# Altium PCB TSAL.PcbDoc
Units mm, origin at the board's own origin, x right, y up, seen from the top; angles counter-clockwise.
Board outline 91 x 81 mm, 2 copper layers (Top Layer, Bottom Layer); 29 components, 19 nets, 85 pads, 2 vias.
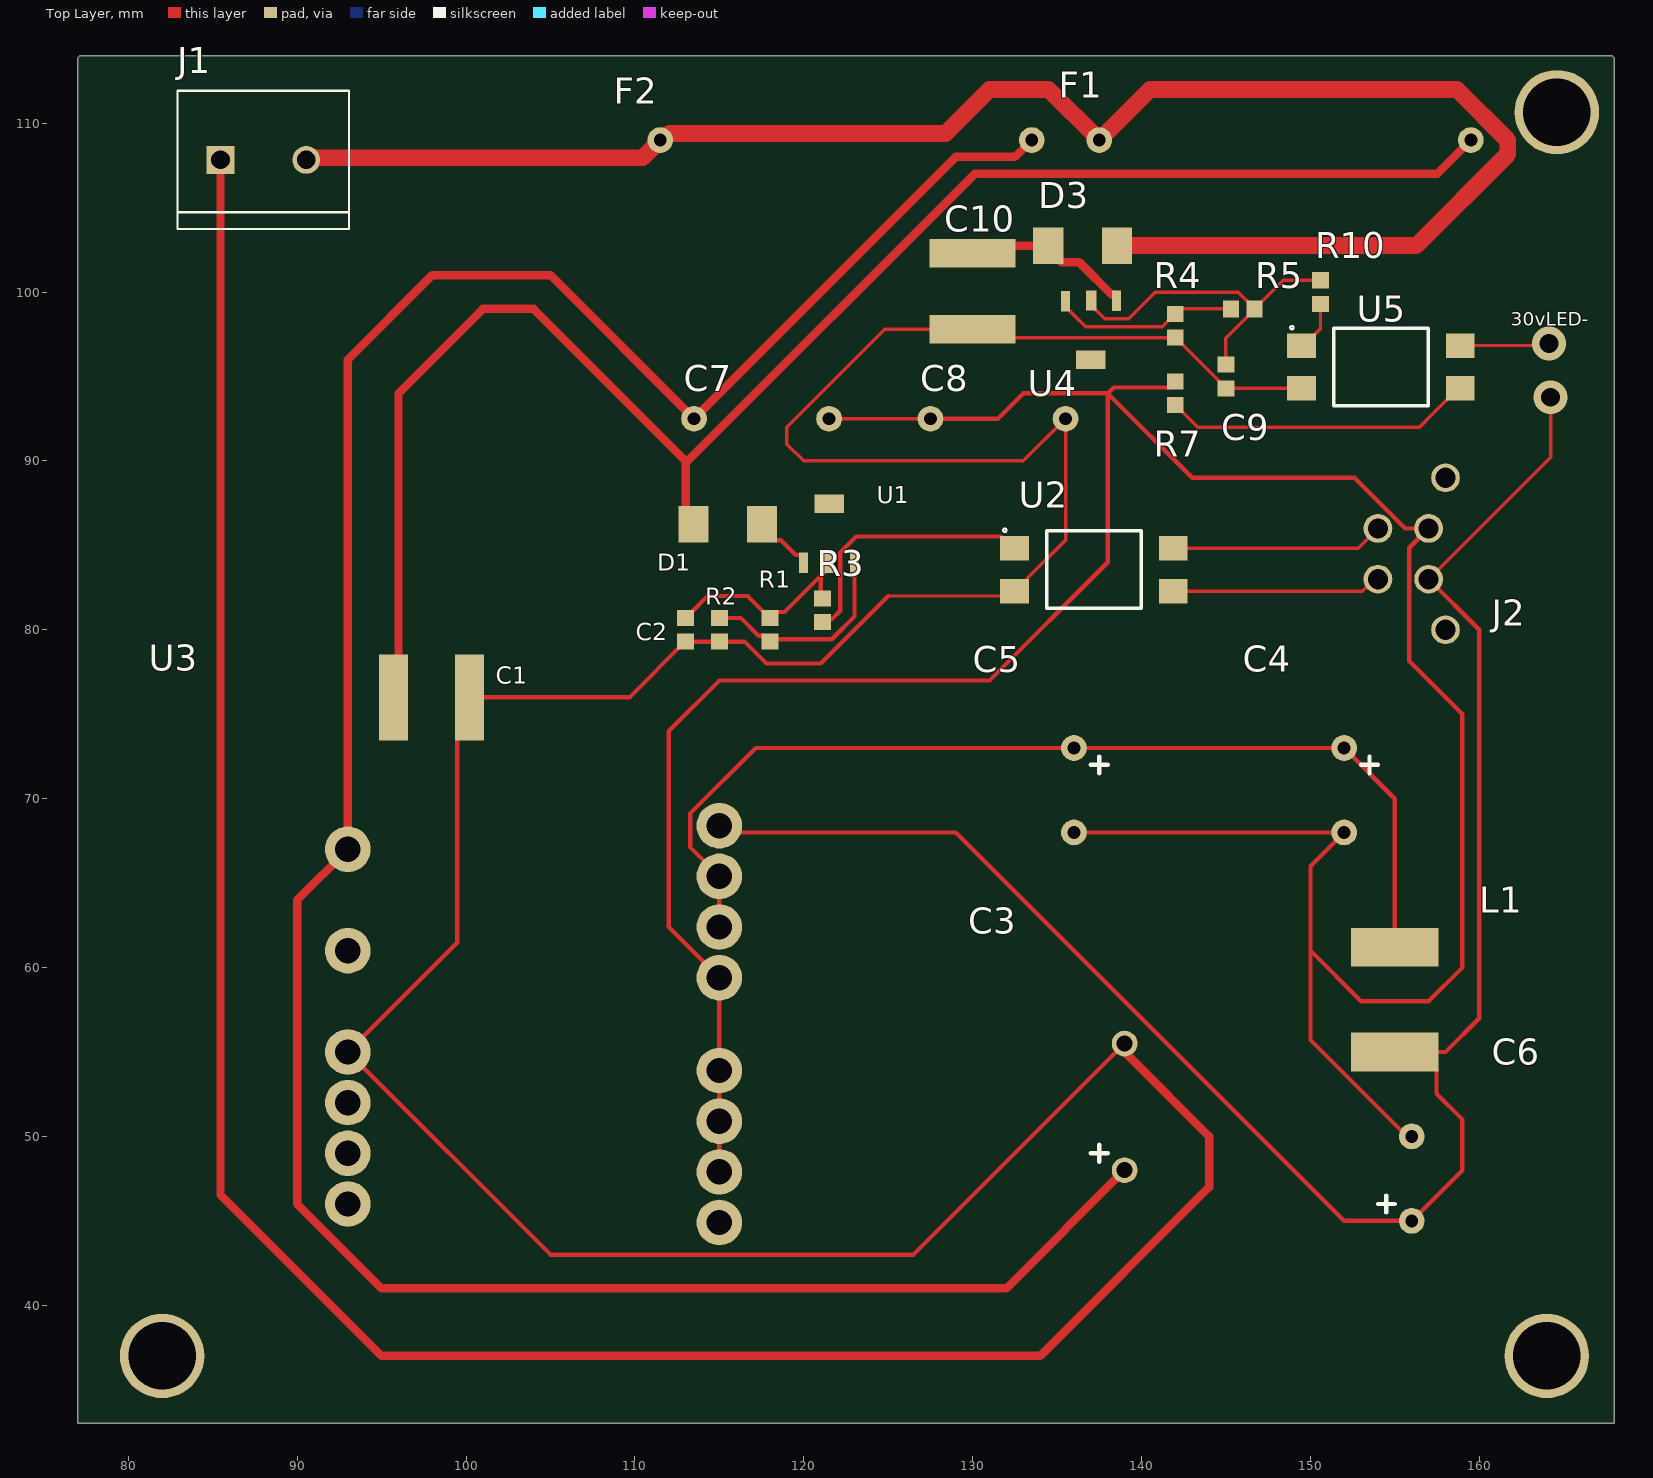
[diagram p0: Top Layer view]
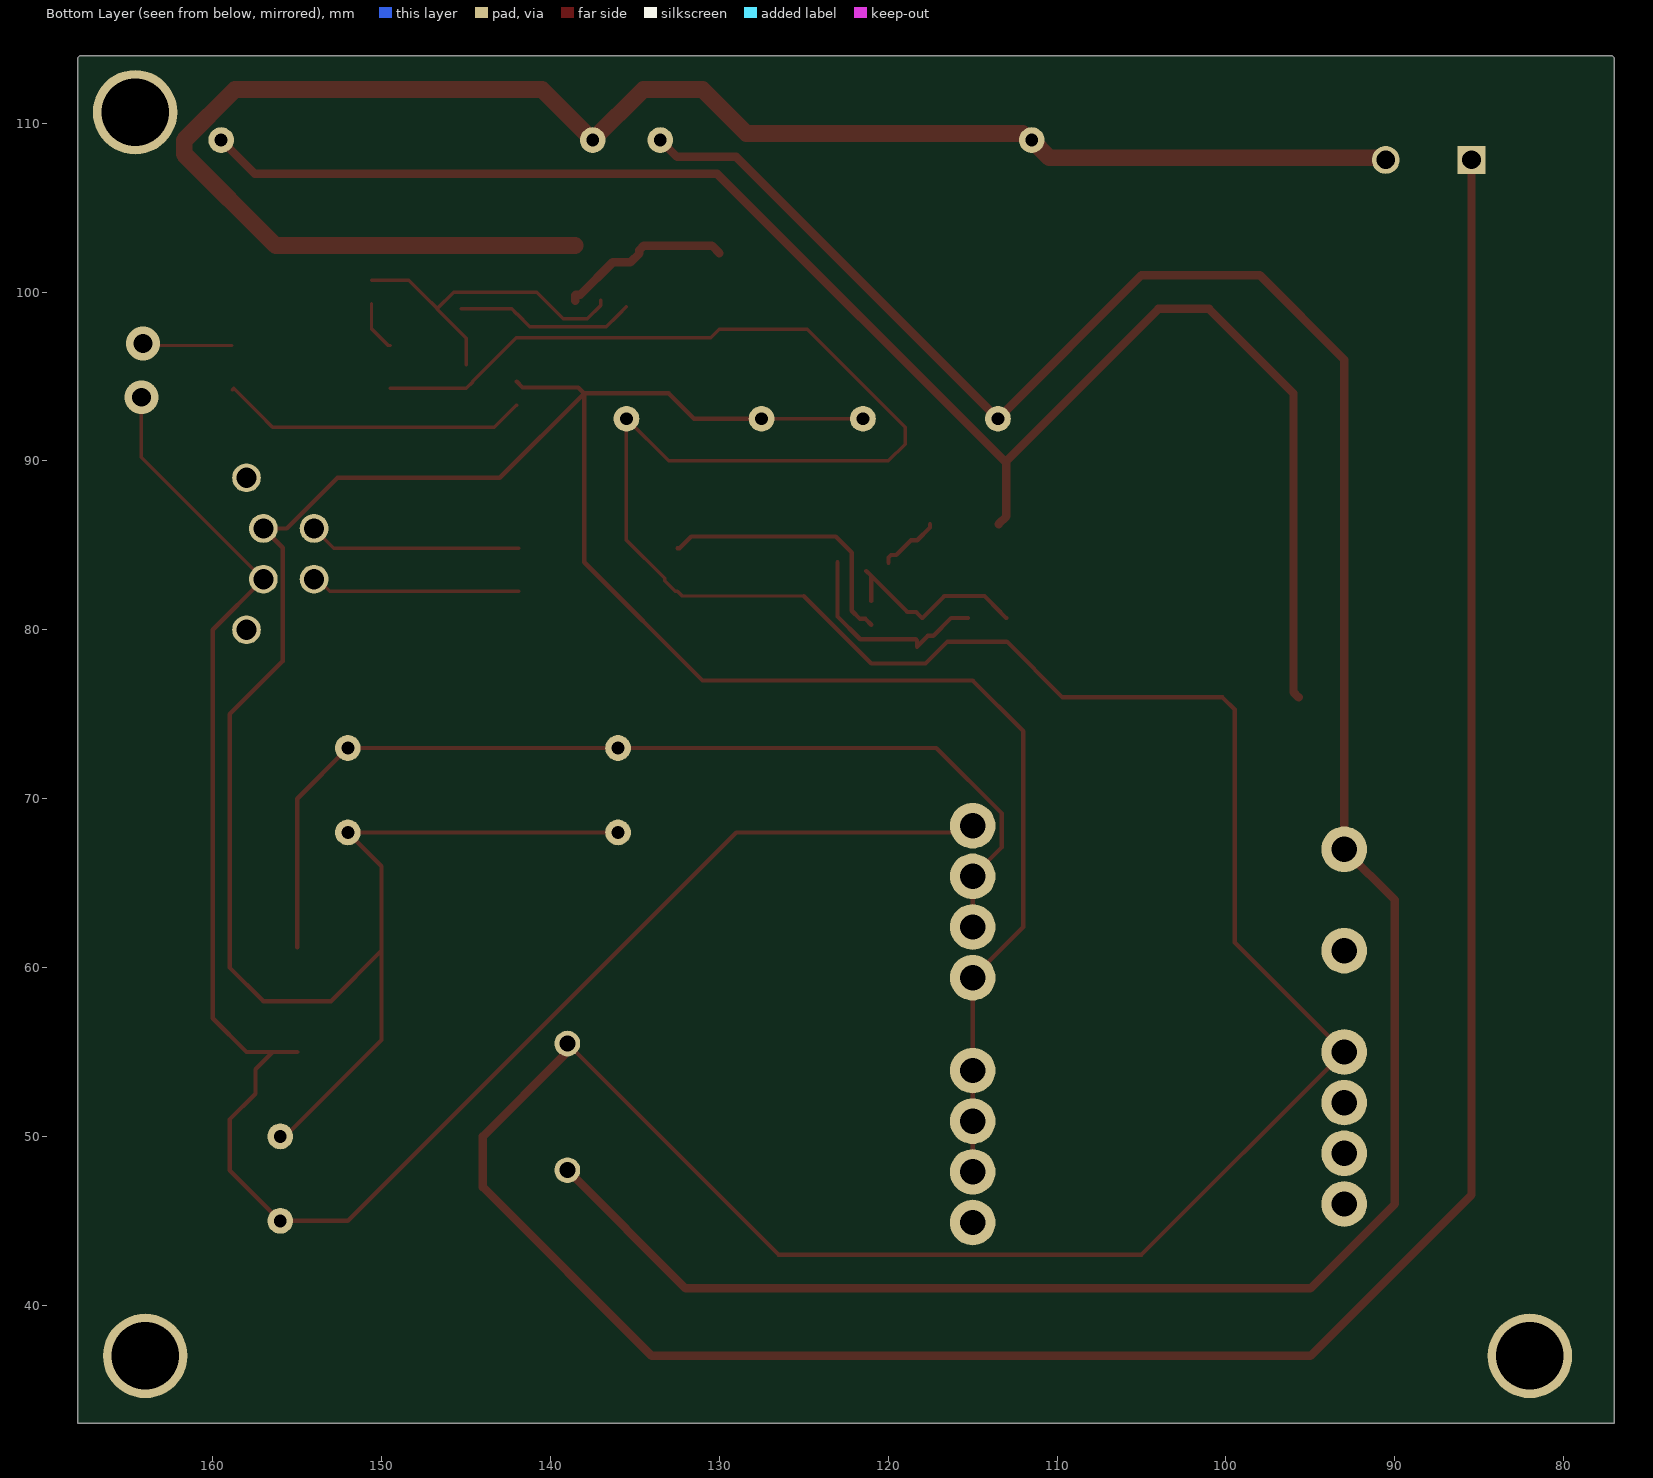
[diagram p1: Bottom Layer view, seen from below]
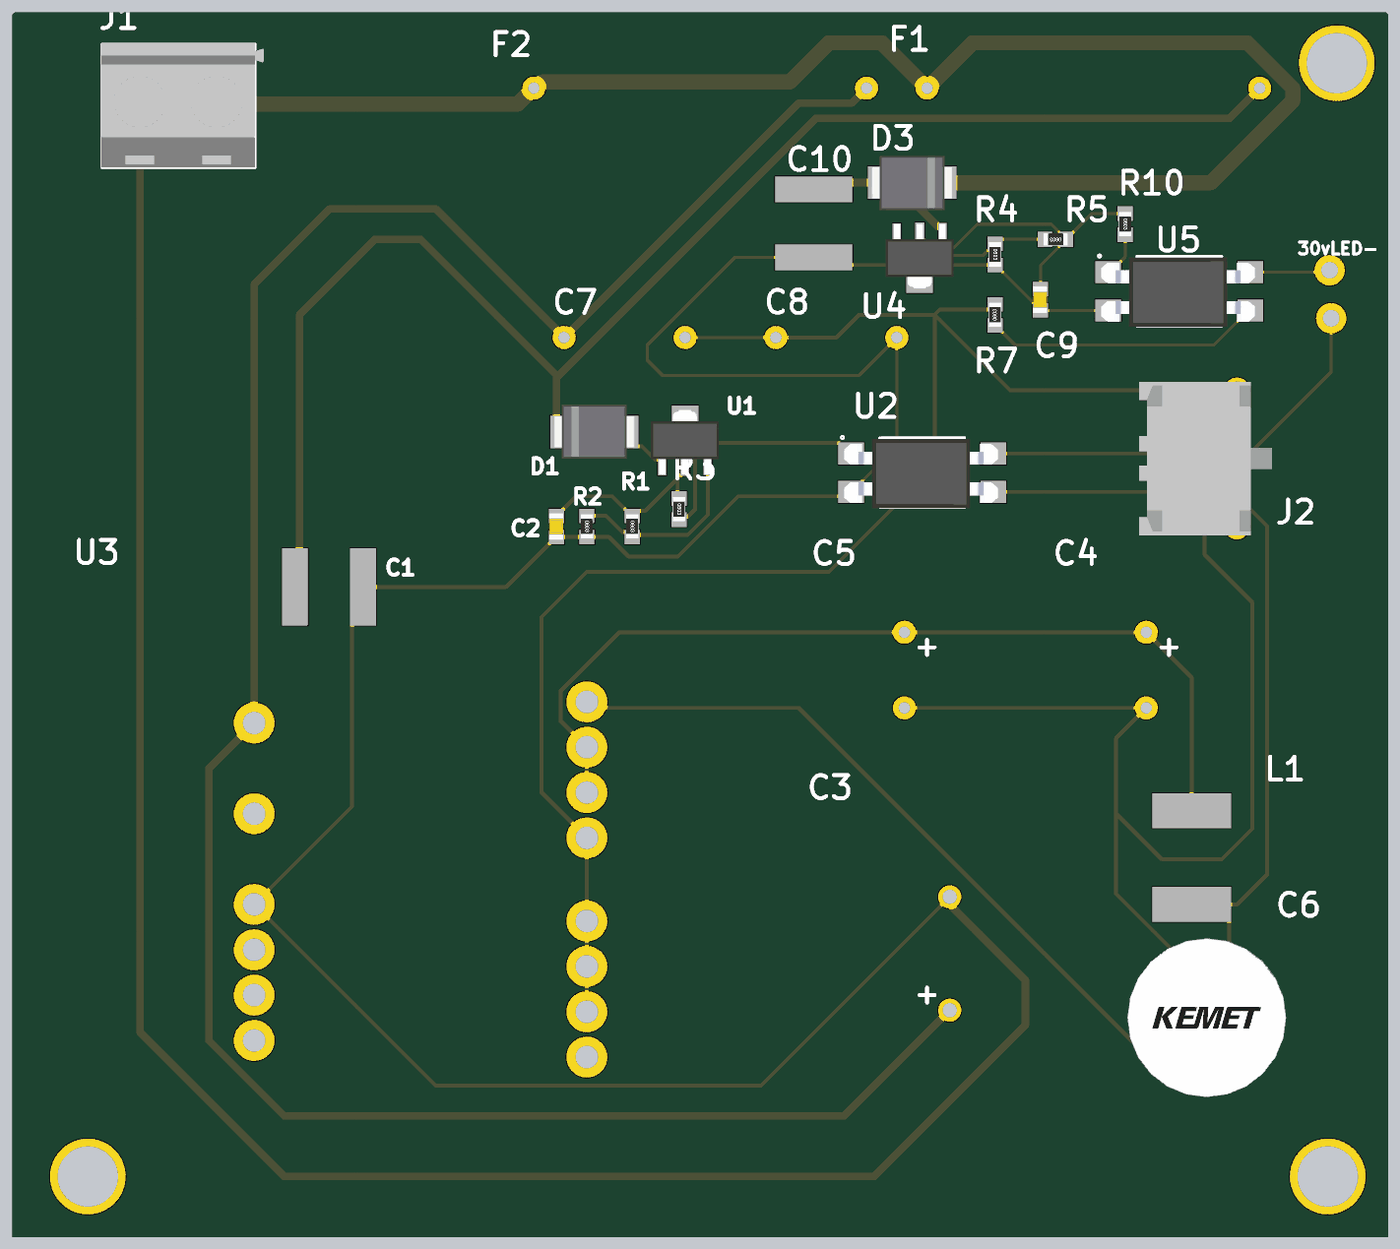
[diagram p2: 3D render of the assembled board from above, using the file's embedded part models]

## Layer stack, top to bottom
Top Solder: solder mask 0.0102, Solder Resist, Dk 3.5
Top Layer: signal copper 0.0356
Dielectric 1: dielectric 0.32, FR-4, Dk 4.8
Bottom Layer: signal copper 0.0356
Bottom Solder: solder mask 0.0102, Solder Resist, Dk 3.5

## Board outline
77,33 77,113.851 77.149,114 167.851,114 168,113.851 168,33

## Design rules (kind name [scope] priority, off if disabled: settings)
BoardOutlineClearance [All] p1: gap=0.381 ignorepadtopadclearanceinfootprint=FALSE
Clearance [All] p1: gap=0.152 ignorepadtopadclearanceinfootprint=FALSE except(0: Arc-Hole Track-Hole SMDPad-Hole THPad-Hole Via-Hole Fill-Hole Poly-Hole Region-Hole Text-Hole)
ComponentClearance [All] p1: gap=0.025 collisioncheckmode=3 verticalgap=0.025 showdistances=FALSE
DiffPairsRouting [All] p1: maxlimit=10 minlimit=0.152 mostfreqgap=0.203 toplayer_minwidth=0.152 toplayer_maxwidth=0.381 toplayer_prefwidth=0.203 bottomlayer_minwidth=0.152 bottomlayer_maxwidth=0.381 bottomlayer_prefwidth=0.203 maxuncoupledlength=12.7
HoleSize [All] p1: absolutevalues=TRUE maxlimit=6.731 minlimit=0.33 maxpercent=80.000 minpercent=20.000
HoleToHoleClearance [All] p1: gap=0.254 allowstackedmicrovias=FALSE
MinimumAnnularRing [All] p1: minimumring=0.178
MinimumSolderMaskSliver [All] p1: minsoldermaskwidth=0
PlaneClearance [All] p1: clearance=0.254
PlaneConnect [All] p1: planeconnectstyle=Direct reliefexpansion=0.406 reliefentries=4 reliefconductorwidth=0.152 reliefairgap=0.152
PolygonConnect [All] p1: connectstyle=Relief reliefconductorwidth=0.203 reliefentries=4 polygonreliefangle="90 Angle" airgapwidth=0.152
RoutingCorners [All] p1: cornerstyle=45-Degree minsetback=1.25 maxsetback=1.25
RoutingVias [All] p1: holewidth=0.381 width=0.762 viastyle="Through Hole" minholewidth=0.33 minwidth=0.686 maxholewidth=2.54 maxwidth=2.896
SilkToSilkClearance [All] p1: silktosilkclearance=0
SilkToSolderMaskClearance [IsPad] p1: minsilkscreentomaskgap=0.152 clearancetoexposedcopper=TRUE
SolderMaskExpansion [All] p1: expansion=0.075 istentingtop=FALSE
Width [All] p1: maxlimit=10.16 minlimit=0.152 preferedwidth=0.203
20 further rules are at their usual default settings.

## Components (designator, comment, footprint, x,y, rotation, side; value= is the part's Value field where it differs from the comment)
C1 "450V 1uF" CKG57KX7T2W105K335JH 98,76 r180 top
C2 "25V 1uF" C0603C105K3RACTU 113,80 r90 top
C3 "450V, 100uF" 450BXW100MEFR18X30 139,50.5 r90 top
C4 "25V, 1500µF" 25ZLS1500MEFC12.5X20 152,71 r270 top
C5 "25V, 1500µF" 25ZLS1500MEFC12.5X20 136,71 r270 top
C6 "25V, 820µF" ESY827M025AH5AA 156,47 r90 top
C7 "400V, 330pF" DE2B3SA331KN3AY02F 120,93 r180 top
C8 "400V, 330pF" DE2B3SA331KN3AY02F 129,92 r0 top
C9 "25V 1uF" C0603C105K3RACTU 145,95 r90 top
C10 "450V 1uF" CKG57KX7T2W105K335JH 130,100 r90 top
D1 "SMBJ5371B-TP" 214AA 116,86 r0 top
D3 "SMBJ5363B" 214AA 136,103 r180 top
F1 "0477002.MXEP, 2A, 400V" 0477002.MXEP 140,109 r0 top
F2 "0477002.MXEP, 2A, 400V" 0477002.MXEP 114,109 r0 top
J1 "282837-2" 282837-2 88.075,108.35 r0 top
J2 "0430450412" 0430450412 156,85 r270 top
L1 "1267AY-2R2N=P3" 1267AY2R2NP3 155,58 r270 top
R1 "6.04K" "Resistor 0603" 118,80 r270 top
R2 "18.2K" "Resistor 0603" 115,80 r270 top
R3 "220" "Resistor 0603" 121.1,81.15 r270 top
R4 "18.2K" "Resistor 0603" 142,98 r270 top
R5 "6.04K" "Resistor 0603" 146,99 r180 top
R7 "120 ohm" "Resistor 0603" 142,94 r90 top
R10 "220" "Resistor 0603" 150.6,100 r270 top
U1 "LR8N8-G" TO-243AA(SOT-89-3) 121.501,83.898 r0 top
U2 "SFH617A" SFH617A 137,84 r0 top
U3 "BPM1234SJ" BPM1234SJ 99,60.8 r0 top
U4 "LR8N8-G" TO-243AA(SOT-89-3) 137,99.556 r180 top
U5 "SFH617A" SFH617A 154,96 r0 top

## Footprints (in the part's own frame and the unit in brackets; to place one, negate y for a bottom-side part, rotate by r counter-clockwise, add the part's x,y. Pads: shape width x height; smd on the part's side, far side on the other; paste and mask are expansions set on the pad)
25ZLS1500MEFC12.5X20 [mil]
  round 60 hole 30: 1(118.11,0) 2(-78.74,0)
  silkscreen extent -59,39 -20,79, body extent -226,-246 266,246, height 787
214AA [mil]
  rect 70x85.04 smd: 1(-100,10) 2(60,10)
  body extent -126,-60 86,82, height 91
450BXW100MEFR18X30 [mm]
  round 1.524 hole 0.95: 1(5,0) 2(-2.5,0)
  silkscreen extent -2,1 -1,2, body extent -8.25,-9.5 10.75,9.5, height 30
1267AY2R2NP3 [mm]
  rect 2.3x5.2 smd: 1(-3.2,0) 2(3,0)
  body extent -4.25,-4.1 4.05,4.2, height 4
282837-2 [mm] "2 pin connection through hole"
  rect 1.65x1.65 hole 1.1: 1(-2.615,-0.526)
  round 1.65 hole 1.1: 2(2.465,-0.526)
  silkscreen extent -5.16,-4.63 5,3.57, body extent -5.18,-4.6 5.58,3.6, height 10.01
0477002.MXEP [mil] "Fuse 2A"
  round 60 hole 30: 1(-98.43,0) 2(767.72,0)
  body extent -89,-197 758,118, height 217
0430450412 [mm]
  round 1.7 hole 1.2: 1(2,-2) 2(-1,-2) 3(2,1) 4(-1,1)
  round 1.7 hole 1.2 unplated: 24(-4,2) 25(5,2)
  body extent -4.57,-4.47 5.58,4.3, height 9.92
BPM1234SJ [mm] "Isolated DC-DC converter 12V"
  round 2.7 hole 1.5: 1(-6,6.2) 2(-6,0.2) 3(-6,-5.8) 4(-6,-8.8) 5(-6,-11.8) 6(-6,-14.8) 7(16,-15.9) 8(16,-12.9) 9(16,-9.9) 10(16,-6.9) 11(16,-1.4) 12(16,1.6) 13(16,4.6) 14(16,7.6)
  body extent -18.05,-20.5 28.45,16, height 23.6
C0603C105K3RACTU [mm]
  rect 0.95x1 smd: 1(-0.7,0) 2(0.7,0)
  body extent -0.87,-0.45 0.87,0.5, height 0.96
CKG57KX7T2W105K335JH [mm]
  rect 1.7x5.1 smd: 1(-2.2,0) 2(2.3,0)
  body extent -3,-2.5 3,2.5, height 3.35
DE2B3SA331KN3AY02F [mil]
  round 60 hole 30: 1(-59.06,19.68) 2(255.91,19.68)
ESY827M025AH5AA [mil]
  round 60 hole 30: 1(118.11,0) 2(-78.74,0)
  silkscreen extent -59,39 -20,79, body extent -187,-207 227,207, height 1064
"Resistor 0603" [mm]
  rect 0.95x1 smd: 1(-0.7,0) 2(0.7,0)
  body extent -0.8,-0.41 0.8,0.41, height 0.45
SFH617A [mm]
  rect 1.7x1.45 smd: 1(-4.521,0.833) 2(-4.521,-1.707) 3(4.879,-1.707) 4(4.879,0.833)
  silkscreen extent -5.19,-2.73 2.98,1.99, body extent -4.98,-2.79 5.18,1.79, height 3.7
TO-243AA(SOT-89-3) [mm]
  rect 0.55x1.2 smd: 1(-1.524,0.076) 3(1.499,0.102)
  rect 0.6x1.2 smd: 2(-0.025,0.051)
  rect 1.75x1.1 smd: 4(0,3.556)
  body extent -2.26,-0.45 2.24,3.8, height 1.55

## Part data
C1 C10: library part CKG57KX7T2W105K335JH, "Decoupling capacitor", ComponentLink1Description=Datasheet, ComponentLink1URL=https://product.tdk.com/info/en/catalog/datasheets/mlcc_commercial_megacap_en.pdf, ComponentLink2Description=Supplier, ComponentLink2URL=https://www.digikey.com/product-detail/en/tdk-corporation/CKG57KX7T2W105K335JH/445-10489-1-ND/3932416
C2 C9: library part C0603C105K3RACTU, "Capacitor, Ceramic, 1 uF, 25 V, ±10% SMT, 0603", ComponentLink1Description=Datasheet, ComponentLink1URL=https://content.kemet.com/datasheets/KEM_C1002_X7R_SMD.pdf, ComponentLink2Description=Supplier, ComponentLink2URL=https://www.digikey.com/product-detail/en/kemet/C0603C105K3RACTU/399-7376-1-ND/3317410
C3: library part 450BXW100MEFR18X30, "Capacitors, Radial, Can, 100µF 450V Aluminum", ComponentLink1Description=Datasheet, ComponentLink1URL=http://www.rubycon.co.jp/en/catalog/e_pdfs/aluminum/e_BXW.pdf, ComponentLink2Description=Supplier, ComponentLink2URL=https://www.digikey.com/product-detail/en/rubycon/450BXW100MEFR18X30/1189-3221-ND/6050094
C4 C5: library part 25ZLS1500MEFC12.5X20, "Capacitors, Aluminum Electrolytic, Radial, Can, 1500µF, 25V", ComponentLink1Description=Datasheet, ComponentLink1URL=http://www.rubycon.co.jp/en/catalog/e_pdfs/aluminum/e_zls.pdf, ComponentLink2Description=Supplier, ComponentLink2URL=https://www.digikey.com/product-detail/en/rubycon/25ZLS1500MEFC12.5X20/1189-2590-ND/4977137
C6: library part ESY827M025AH5AA, "Capacitors Radial, Can, 820µF 25V Aluminum Electrolytic, 23mOhm @ 100kHz 4000 Hrs @ 105°C", ComponentLink1Description=Datasheet, ComponentLink1URL=https://content.kemet.com/datasheets/KEM_A4007_ESY.pdf, ComponentLink2Description=Supplier, ComponentLink2URL=https://www.digikey.com/product-detail/en/kemet/ESY827M025AH5AA/399-6647-ND/3083062
C7 C8: library part DE2B3SA331KN3AY02F, "Capacitor, 330pF ±10% 400VAC Ceramic Capacitor B Radial, Disc"
D1: "Diode, Zener, 60V 5W ±5% Surface Mount DO-214AA (SMB)"
D3: "Diode Zener 30V 5W ±5% Surface Mount DO-214AA (SMB)"
F1 F2: library part 0477002.MXEP, "Fuse, 2A 500V AC 400V DC Fuse Cartridge, Ceramic Through Hole 5mm x 20mm (Axial)"
J1: "Connector Terminal Blocks Receptacle 2 Position 5.08mm Solder Straight Thru-Hole 13.5A/Contact"
J2: "Connector Header Through Hole 4 position 0.118\" (3.00mm)", ComponentLink1Description=Datasheet, ComponentLink1URL=https://www.molex.com/pdm_docs/sd/430450412_sd.pdf, ComponentLink2Description=Supplier, ComponentLink2URL=https://www.digikey.com/product-detail/en/molex/0430450412/WM1790-ND/252503
L1: "Shielded Wirewound Inductor, 2.2µH ,7.4A 13.2mOhm Max Nonstandard", ComponentLink1Description=Datasheet, ComponentLink1URL=https://www.murata.com/~/media/webrenewal/products/inductor/chip/tokoproducts/wirewoundferritetypeforpl/m_dg8040c.ashx?la=en, ComponentLink2Description=Supplier, ComponentLink2URL=https://www.digikey.com/product-detail/en/murata-electronics/1267AY-2R2N=P3/490-10831-2-ND/5271472
R1 R5: library part ERJ-3EKF6041V, "Resistor, 6.04 kOhms ±1% 0.1W, 1/10W Chip Resistor 0603 (1608 Metric) Automotive AEC-Q200 Thick Film", ComponentLink1Description=Supplier, ComponentLink1URL=https://www.digikey.com/product-detail/en/panasonic-electronic-components/ERJ-3EKF6041V/P6.04KHCT-ND/198452
R2 R4: library part ERJ-3EKF1822V, "Resistor, 18.2K ohms, 0603, SMD"
R3 R10: library part ERJ-3EKF2200V, "Resistor, 220 ohm, 0603"
R7: library part ERJ-3EKF1200V, "Resistor, 120 ohms, 0603, SMD"
U1 U4: "Voltage Regulator, Linear, input max 480V, output 1.2V - 440V, TO-243AA , SMD", ComponentLink1Description=Datasheet, ComponentLink1URL=https://www.mouser.com/datasheet/2/268/20005399A-909415.pdf, ComponentLink2Description=Supplier, ComponentLink2URL=https://www.digikey.com/product-detail/en/microchip-technology/LR8N8-G/LR8N8-GCT-ND/4918747
U2 U5: "opto-Isolator", ComponentLink1Description=Datasheet, ComponentLink1URL=http://www.vishay.com/docs/83740/sfh617a.pdf, ComponentLink2Description=Supplier, ComponentLink2URL=https://www.digikey.com/product-detail/en/vishay-semiconductor-opto-division/SFH617A-2X017T/SFH617A-2X017TCT-ND/8556837
U3: "Isolated DC-DC converters, 12 V, 3.4A", ComponentLink1Description=Datasheet, ComponentLink1URL=https://www.mouser.com/datasheet/2/397/BPM1234SJ_1612EE-1272167.pdf, ComponentLink2Description=Supplier, ComponentLink2URL=https://www.mouser.com/ProductDetail/Tamura/BPM1234SJ?qs=JtOM4tvdyp3RA%2FViNUppcg%3D%3D

## Free pads (board coordinates)
  round 5 hole 4 unplated: N/A(82,37) N/A(164,37) N/A(164.6,110.65)

## Via types
v1: diameter 2, hole 1.11, Top Layer to Bottom Layer, 2 vias

## Nets (pads, with @x,y where several pads share a name; then routed paths per layer and width w, separated by ;. In a path a pad name is that pad's centre, name@x,y a point inside that pad or via, vN(x,y) a via of type N, cw(c..) or ccw(c..) an arc to the next point about the centre after c; other vN are vias at no path point)
12V+: C6.2 J2.3 L1.2 U3.14 | length 109.8
  Top Layer w0.203: J2.3 164.225,90.225 v1(164.225,93.775)
  Top Layer w0.254: U3.14 115.4,68 129,68 152,45 C6.2 159,48 159,51 157.473,52.527 157.473,53.977 L1.2@156.45,55 ; L1.2 L1.2@156.45,55 ; J2.3 160,80 160,57 158,55 L1.2@156.45,55
12V-: C4.1 C5.1 C6.1 C7.1 C8.1 J2.4 R7.2 U3.8 U3.9 U3.10 U3.11 | length 187.5
  Top Layer w0.203: C7.1 C8.1
  Top Layer w0.254: U3.8 U3.9 U3.10 U3.11 112,62.4 112,74 115,77 119,77 131,77 138,84 138,94 ; C8.1 131.5,92.5 133,94 138,94 ; C5.1 C4.1 150,66 150,61 ; R7.2 141.652,94.352 138.352,94.352 138,94 ; C6.1 155.711,50 150,55.711 150,61 ; 138,94 143,89 152.616,89 155.616,86 J2.4 155.857,84.857 155.857,78.143 159,75 159,60 157,58 153,58 150,61
555out: J2.2 U2.4 | length 12.6
  Top Layer w0.203: U2.4 152.833,84.833 J2.2
HV+: D3.1 F1.1 F2.1 J1.2 | length 103.1
  Top Layer w1: J1.2@90.24,107.948 91.124,107.948 91.126,107.95 110.45,107.95 F2.1 111.642,109 112.042,109.4 128.4,109.4 131,112 134.5,112 F1.1 140.5,112 158.675,112 161.686,108.989 161.686,108.161 156.271,102.746 D3.1
HV-: C1.1 C2.1 C3.1 C8.2 C9.1 C10.1 J1.1 R2.2 R4.2 U2.2 U3.3 U5.2 | length 319.4
  Top Layer w0.203: 125,82 132.186,82 U2.2 132.604,82.293 133.227,82.916 133.227,83.041 135.5,85.314 C8.2 133,90 120,90 119,91 119,92 124.8,97.8 C10.1 130.5,97.3 R4.2 142.025,97.3 144.602,94.723 144.602,94.673 144.975,94.3 C9.1 145.007,94.293 U5.2
  Top Layer w0.254: 125,82 121,78 117.786,78 116.486,79.3 R2.2 C2.1 112.975,79.3 109.675,76 C1.1 99.477,75.277 99.477,61.477 U3.3 105,43 126.5,43 C3.1
  Top Layer w0.5: J1.1 85.46,46.54 95,37 134,37 144,47 144,50 139.196,54.804 139.196,55.304 C3.1
LED-: U5.4 | length 5.3
  Top Layer w0.203: U5.4 164.008,96.833 v1(164.125,96.95)
LedON: J2.1 U2.3 | length 12.4
  Top Layer w0.203: U2.3 153.074,82.293 153.781,83 J2.1
NetC1_2: C1.2 D1.1 F1.2 | length 99.2
  Top Layer w0.5: C1.2 96,76.3 96,94 101,99 104,99 113,90 113,86.714 D1.1 ; 113.062,89.937 130.125,107 157.5,107 F1.2
NetC2_2: C2.2 R1.1 R3.1 U1.2 | length 12
  Top Layer w0.254: C2.2 113.025,80.7 113.373,81.048 113.373,81.073 114.3,82 116.675,82 117.975,80.7 R1.1 118.348,81.048 118.867,81.048 120.996,83.177 U1.2@121.303,83.484 ; R3.1@121,81.7 121,83.173
NetC3_2: C3.2 C7.2 F2.2 U3.1 | length 158.1
  Top Layer w0.5: F2.2 132.5,108 129,108 C7.2 105,101 98,101 93,96 U3.1 90,64 90,46 95,41 132,41 C3.2
NetC4_2: C4.2 C5.2 L1.1 U3.12 U3.13 | length 60.8
  Top Layer w0.254: U3.12 U3.13 113.269,67.131 113.269,69.117 117.152,73 C4.2 155,70 L1.1
NetC9_2: C9.2 R5.1 R10.1 U4.2 | length 20
  Top Layer w0.203: U4.2 137.025,99.205 137.815,98.415 139.237,98.415 140.822,100 145.725,100 R5.1@146.7,99.025 ; C9.2 145,97.275 R5.1@146.7,98.975 ; R5.1 R5.1@146.7,99.025 ; R10.1 148.4,100.7 147.098,99.398 147.073,99.398 R5.1@146.7,99.025
NetC10_2: C10.2 D3.2 U4.1 | length 10.4
  Top Layer w0.5: C10.2 130.446,102.746 D3.2 134.738,102.484 134.738,102.293 135.263,101.768 136.31,101.768 138.247,99.83 138.499,99.83 138.524,99.805 U4.1
NetD1_2: D1.2 U1.1 | length 3.7
  Top Layer w0.254: D1.2 117.524,86.063 118.286,85.301 118.651,85.301 119.524,84.428 119.829,84.428 119.977,84.28 U1.1
NetR1_2: R1.2 R2.1 U1.3 | length 12.6
  Top Layer w0.254: R2.1@115.275,80.7 116.275,80.7 117.327,79.648 117.652,79.648 118.3,79 118.3,79.371 118.373,79.444 121.658,79.444 123,80.786 U1.3
NetR3_2: R3.2 U2.1 | length 15.9
  Top Layer w0.254: R3.2@121,80.3 121.348,80.648 121.676,80.648 122.157,81.129 122.157,84.571 123.111,85.525 131.662,85.525 132.354,84.833 U2.1
NetR4_1: R4.1 R5.2 U4.3 | length 10.7
  Top Layer w0.203: U4.3@135.501,99.129 136,98.631 136.69,97.94 141.215,97.94 141.975,98.7 R4.1 142.3,99 R5.2
NetR7_1: R7.1 U5.3 | length 18.4
  Top Layer w0.203: R7.1 142.025,93.3 143.325,92 156.461,92 157.277,92.816 158.754,94.293 U5.3@158.847,94.2
NetR10_2: R10.2 U5.1 | length 3
  Top Layer w0.203: U5.1 149.604,96.833 150.6,97.829 R10.2
pads on no net: J2.24 J2.25 U1.4 U3.2 U3.4 U3.5 U3.6 U3.7 U4.4

## Silkscreen, mask and mechanical layers (free items; w line width, h text height)
Top Overlay:
  text "30vLED-" at 161.854,98.004 h0.8
Mechanical 16:
  lines w0.254: 77,33 168,33 168,114 77,114 77,33